# Altium PCB ESP8266.PcbDoc (part 2 of 2)
Units mm, origin at the board's own origin, x right, y up, seen from the top; angles counter-clockwise.
Board outline 50 x 50 mm, 2 copper layers (Top Layer, Bottom Layer); 50 components, 46 nets, 178 pads, 479 vias.
Unrouted connection lines stored in the file: 2.
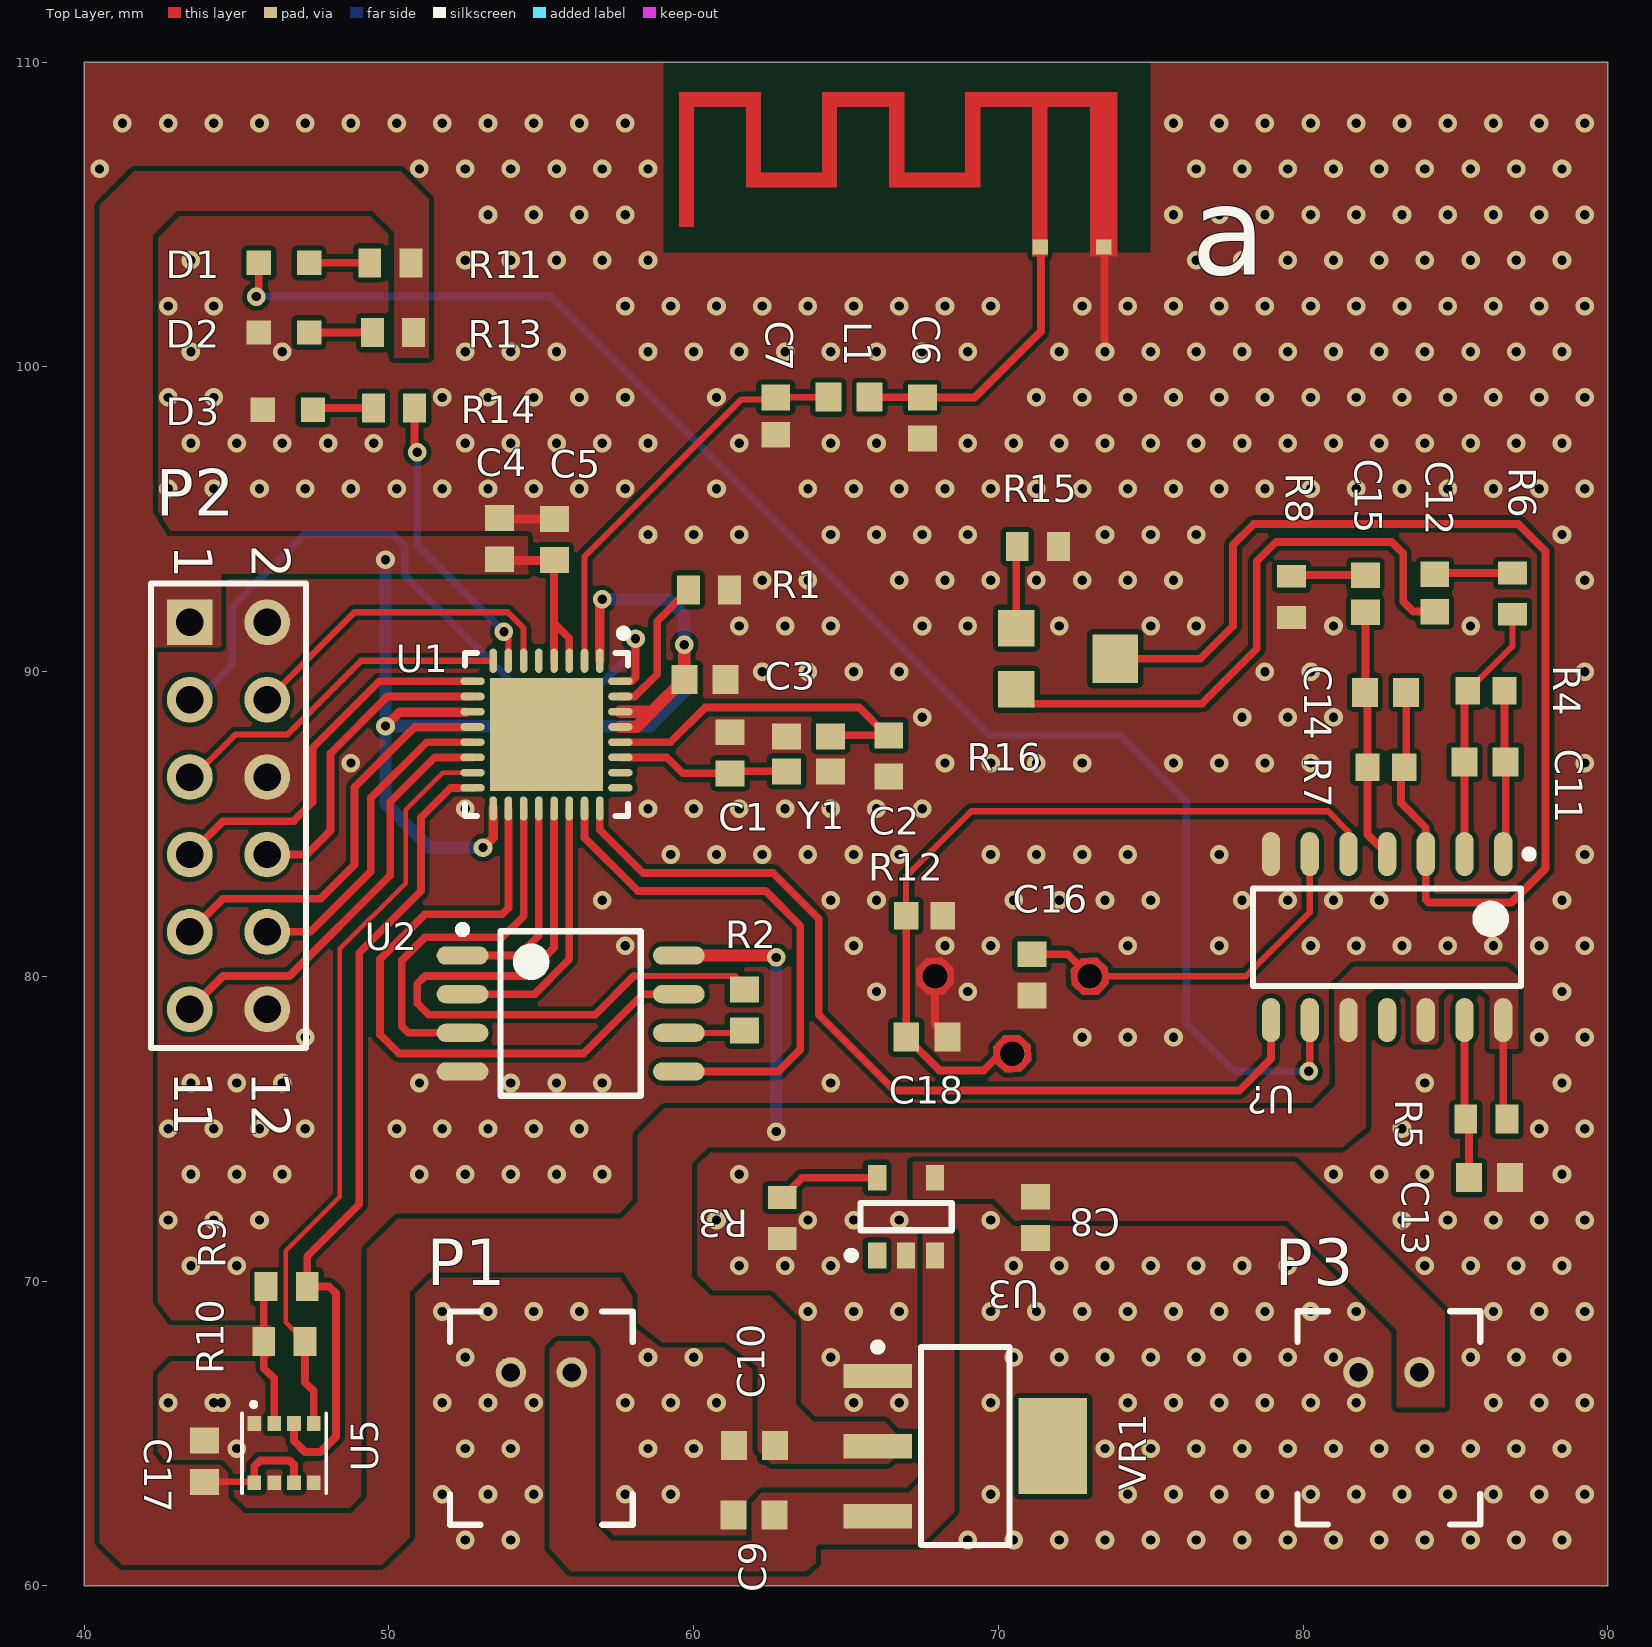
[diagram p0: Top Layer view]

## Polygon pours and split planes (outlines as drawn) (continued)
3v3 on Top Layer "Top Layer-No Net 1" (solid, pour order 12): 62.54,64.008 66.384,64.008 66.624,64.224 66.624,65.024 66.269,65.38 63.92,65.38 63.348,65.952 63.348,68.682 62.509,69.52 60.554,69.52 59.944,70.129 59.944,73.863 58.166,73.863 58.166,72.602 57.408,71.818 57.424,70.674 58.166,69.549 58.166,68.616 58.964,67.997 61.035,67.997 62.107,67.193 62.107,64.442
VIN on Top Layer "Top Layer-No Net 1" (solid, pour order 8): 83.083,65.862 84.658,65.862 84.658,68.986 79.731,73.914 67.183,73.914 67.183,72.746 67.132,72.695 69.85,72.695 70.561,71.984 78.765,71.984 79.477,71.984 83.083,68.378
VBAT on Top Layer "Top Layer-No Net 1" (solid, pour order 6): 55.296,68.021 55.423,68.021 56.575,68.021 56.769,67.742 56.769,62.001 57.302,61.468 62.179,61.468 62.179,62.916 64.211,62.916 64.211,61.468 64.008,61.265 64.008,60.743 63.682,60.477 55.958,60.477 55.27,61.236 55.27,67.767 55.524,68.021
VBAT on Top Layer "VBAT_L01_P004" (solid, pour order 4): 67.513,69.342 67.513,71.526 67.488,71.552 67.513,71.577 68.555,71.577 68.555,62.433 67.488,61.366 61.9,61.366 61.9,62.707 62.236,63.043 67.056,63.043 67.539,63.525
3v3 on Top Layer "Top Layer-No Net 1" (solid, pour order 14): 58.166,73.863 58.166,74.803 59.03,75.667 82.067,75.667 82.067,75.032 81.28,74.397 60.477,74.397 59.944,73.863
3v3 on Top Layer "Top Layer-No Net 1" (solid, pour order 16): 58.263,70.295 51.322,70.295 50.673,69.647 50.673,61.595 49.759,60.681 41.237,60.681 40.513,61.405 40.513,101.74 42.24,101.715 42.24,95.239 42.768,94.364 42.24,94.386 42.24,69.272 42.837,68.467 42.837,67.602 42.24,67.005 42.24,64.351 42.544,63.971 44.462,63.971 44.729,63.703 44.729,62.89 45.249,62.371 48.756,62.371 49.276,62.89 49.276,71.044 50.28,72.048 58.242,72.048
3v3 on Top Layer "Top Layer-No Net 1" (solid, pour order 18): 52.476,93.193 54.559,93.193 54.635,93.269 54.559,93.345 54.559,94.437 41.377,94.437 41.529,94.285 41.529,93.218
3v3 on Top Layer "Top Layer-No Net 1" (solid, pour order 20): 42.24,101.636 42.24,104.318 43.053,105.131 49.454,105.131 50.165,104.419 50.165,100.305 51.308,100.305 51.308,105.512 50.394,106.426 41.631,106.426 40.513,105.308 40.513,101.636
3v3 on Top Layer "Top Layer-No Net 1" (solid, pour order 30): 81.051,79.375 81.026,79.35 81.051,76.403 80.15,75.501 80.15,75.057 82.017,75.057 82.067,75.108 82.067,79.375
3v3 on Top Layer "Top Layer-No Net 1" (solid, pour order 34): 41.986,68.555 42.418,68.555 46.126,68.555 46.126,67.335 45.923,67.539 41.986,67.539
3v3 on Top Layer "Top Layer-No Net 1" (solid, pour order 36): 87.071,77.622 87.071,79.992 86.687,80.315 81.661,80.315 81.026,79.68 81.026,77.775 82.067,77.775 82.067,77.978 82.067,78.207 82.067,79.35 82.372,79.578 83.261,79.578 83.541,79.299 83.541,77.775 83.769,77.775 84.455,77.775 84.455,79.324 84.709,79.578 85.827,79.578 86.131,79.35 86.131,77.622
3v3 on Top Layer "Top Layer-No Net 1" (solid, pour order 22): 41.885,90.805 44.45,90.805 44.501,90.856 44.501,93.447 41.961,93.447 41.91,93.396
GND on Top Layer "Top Layer-No Net 1" (solid, pour order 58): 40,60 90,60 90,110 40,110

## Other copper
Top Layer:
  pour cut-out: 75,110 75,103.75 59,103.75 59,110
Bottom Layer:
  pour cut-out: 75,110 75,103 59,103 59,110

## Silkscreen, mask and mechanical layers (free items; w line width, h text height)
Top Overlay:
  text "a" at 76.327,102.083 h5

## Text inside footprints (layer, text, board x,y; h text height)
P2: Top Overlay "2" at 45.492,94.16 h1.27 r270; Top Overlay "1" at 42.952,94.16 h1.27 r270; Top Overlay "1" at 42.952,76.888 h1.27 r270; Top Overlay "1" at 42.952,75.872 h1.27 r270; Top Overlay "12" at 45.492,76.888 h1.27 r270